# Altium PCB Prog_Adaptor_V1.PcbDoc
Units mm, origin at the board's own origin, x right, y up, seen from the top; angles counter-clockwise.
Board outline 46.85 x 29.75 mm, 2 copper layers (Top Layer, Bottom Layer), stack 1.591 mm thick; 8 components, 10 nets, 57 pads, 0 vias.
Unrouted connection lines stored in the file: 29.
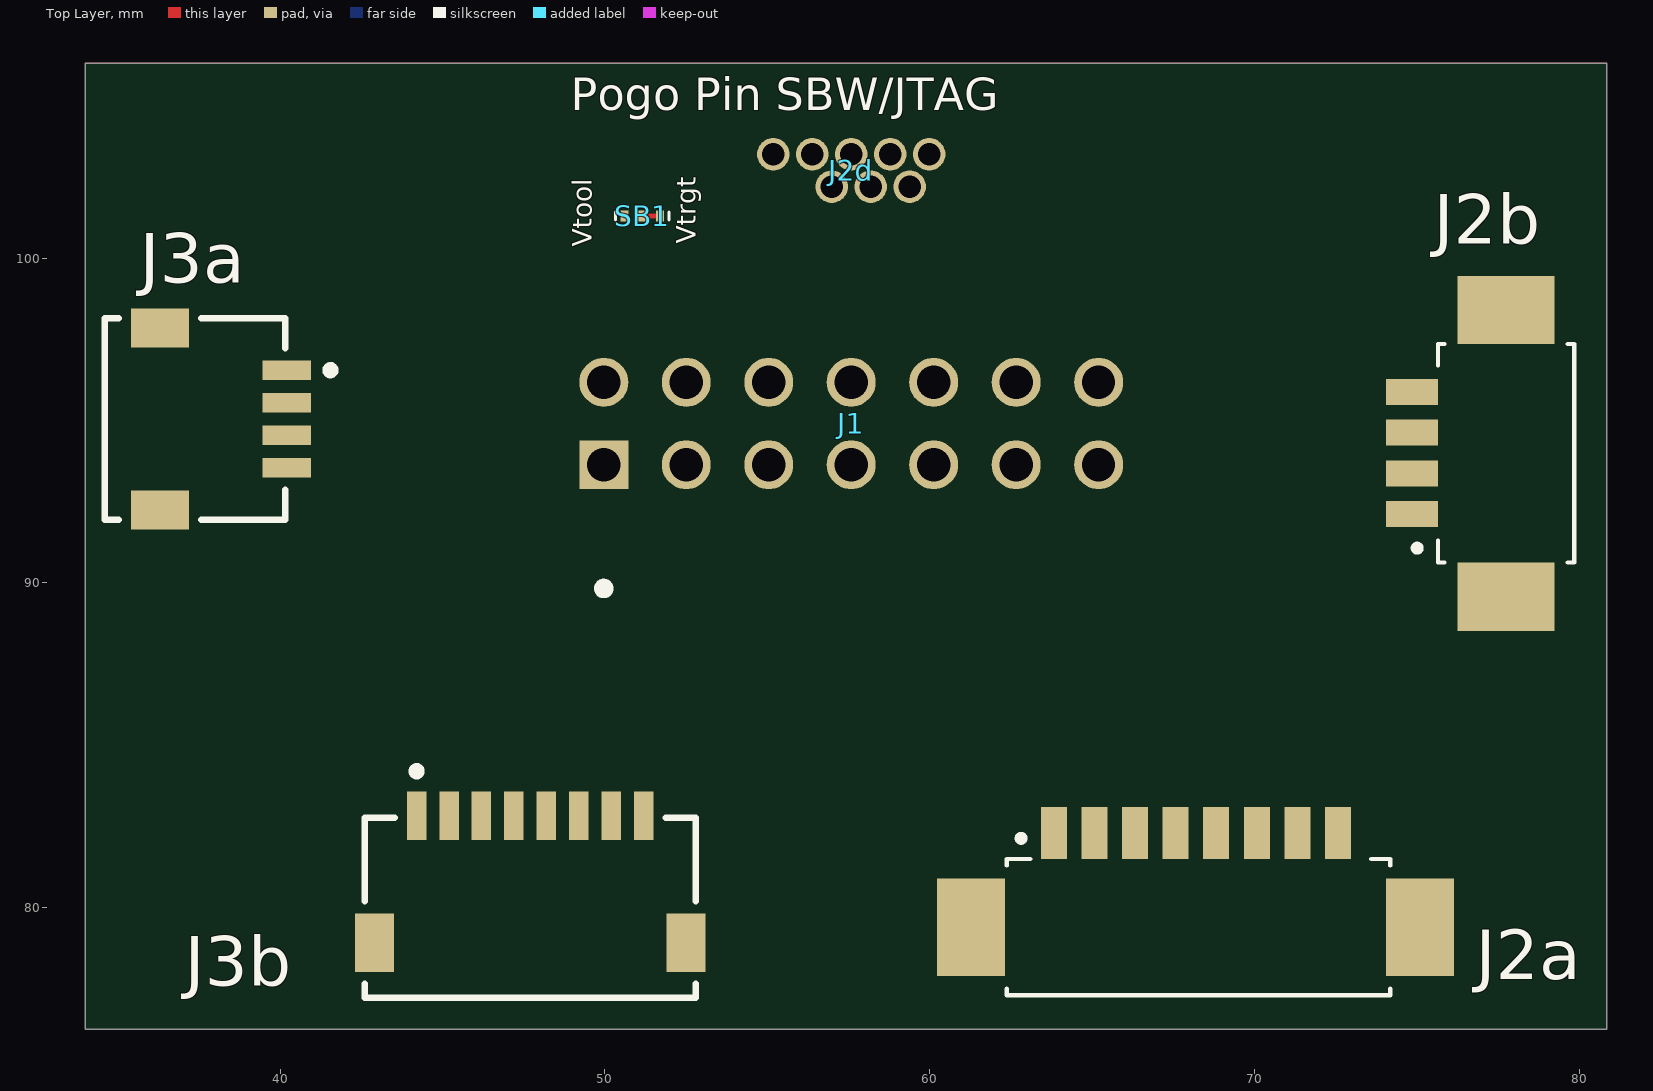
[diagram p0: Top Layer view]
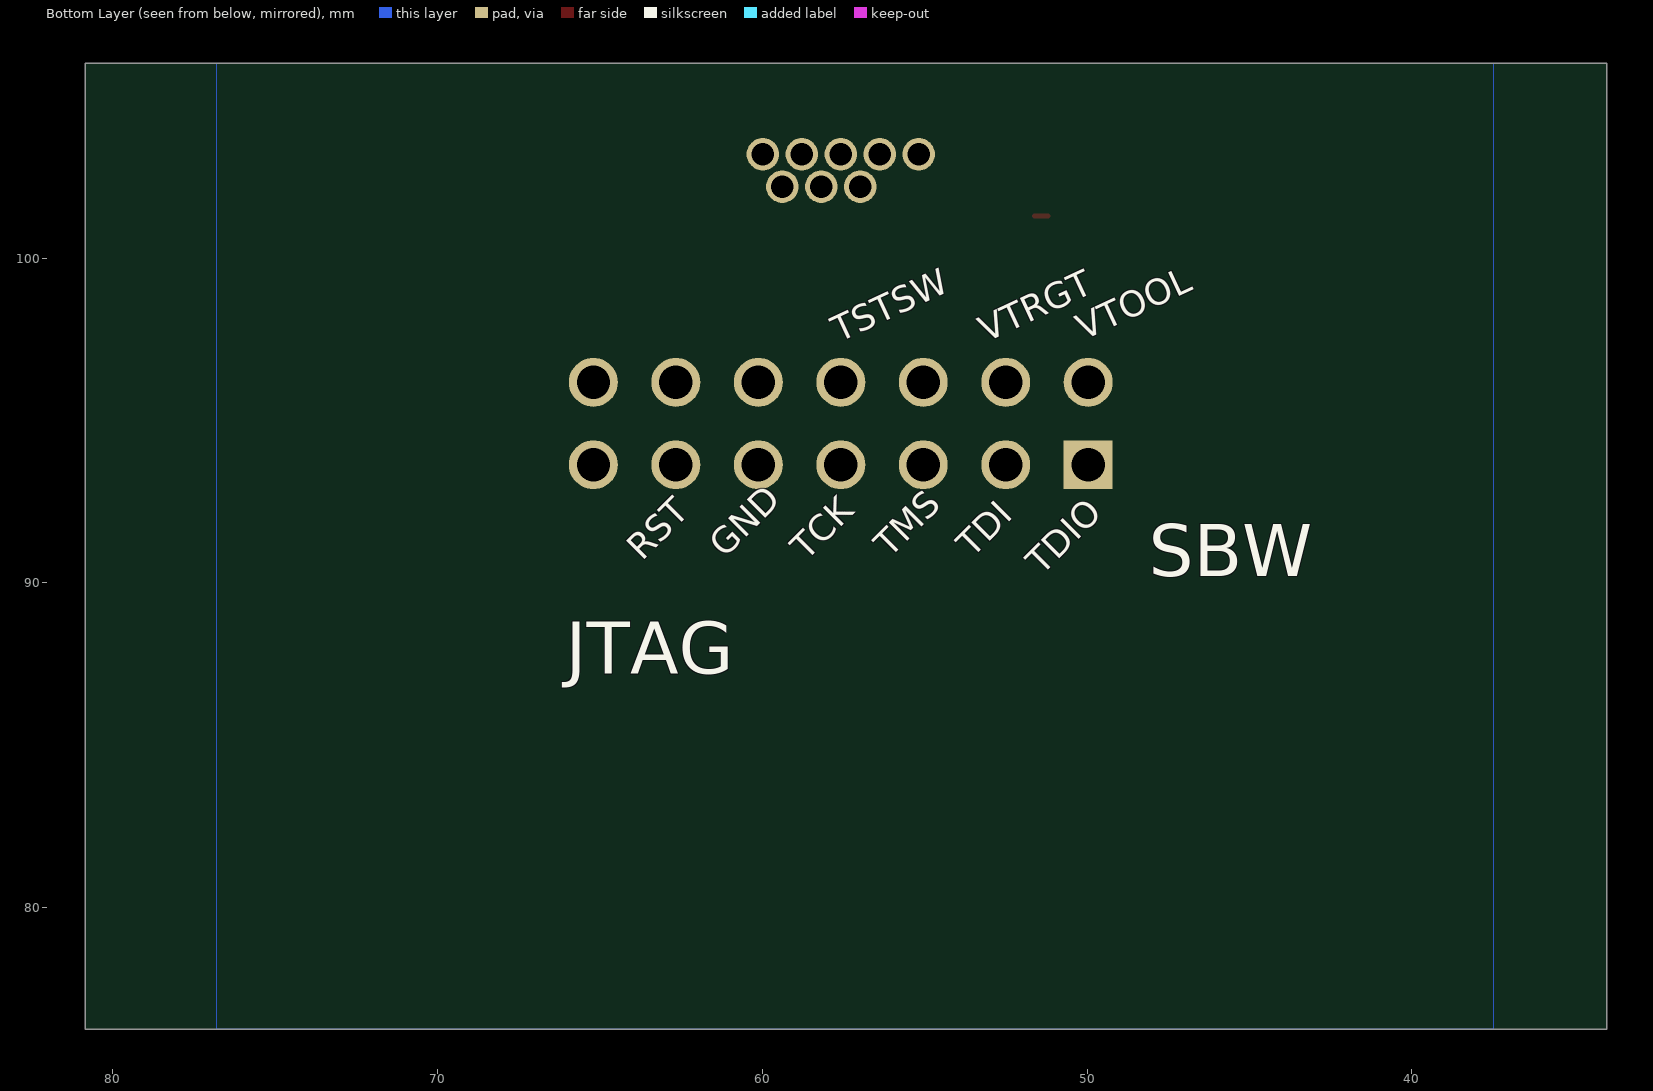
[diagram p1: Bottom Layer view, seen from below]

## Layer stack, top to bottom
Top Solder: solder mask 0.0102, Solder Resist, Dk 3.5
Top Layer: signal copper 0.0356
Dielectric 1: dielectric 1.52, FR-4, Dk 4.8
Bottom Layer: signal copper 0.0356
Bottom Solder: solder mask 0.0102, Solder Resist, Dk 3.5

## Board outline
34,76.25 34,106 80.85,106 80.85,76.25

## Design rules (kind name [scope] priority, off if disabled: settings)
BoardOutlineClearance [All] p1: gap=0.254 ignorepadtopadclearanceinfootprint=FALSE except(0: Arc-SplitContinuation Track-SplitContinuation SMDPad-SplitContinuation THPad-SplitContinuation Via-SplitContinuation Fill-SplitContinuation Poly-SplitContinuation Region-SplitContinuation Text-SplitContinuation)
Clearance [All] p1: gap=0.152 ignorepadtopadclearanceinfootprint=FALSE except(0: Arc-Hole Track-Hole SMDPad-Hole THPad-Hole Via-Hole Fill-Hole Poly-Hole Region-Hole Text-Hole; 0.127: THPad-THPad Via-Via)
HoleSize [All] p1: absolutevalues=TRUE maxlimit=6.2 minlimit=0.3 maxpercent=80.000 minpercent=20.000
MinimumAnnularRing [All] p1: minimumring=0.15
MinimumSolderMaskSliver [All] p1: minsoldermaskwidth=0.1
PolygonConnect ViaConnect [IsVia] p1: connectstyle=Direct reliefconductorwidth=0.254 reliefentries=4 polygonreliefangle="90 Angle" airgapwidth=0.254
PolygonConnect [All] p2: connectstyle=Relief reliefconductorwidth=0.254 reliefentries=4 polygonreliefangle="90 Angle" airgapwidth=0.254
RoomDefinition Prog_Adaptor [InComponentClass('Prog_Adaptor')] p1: confinementstyle=ConfineIn formatcopy=TRUE lockcomponents=FALSE outline 34,76.25 80.9,76.25 80.9,106 34,106
RoutingVias [All] p1: holewidth=0.3 width=0.6 viastyle="Through Hole" minholewidth=0.3 minwidth=0.5 maxholewidth=1 maxwidth=5
SilkToSilkClearance [All] p1: silktosilkclearance=0.1
SilkToSolderMaskClearance [IsPad] p1: minsilkscreentomaskgap=0.1 clearancetoexposedcopper=TRUE
SolderMaskExpansion [All] p1: expansion=0.051 istentingtop=FALSE
SupplyNets "Schematic Supply Nets_1" [InNet('GND')] p1: voltage=0.000
SupplyNets "Schematic Supply Nets" [InNet('3v3')] p2: voltage=0.000
Width [All] p1: maxlimit=25.4 minlimit=0.15 preferedwidth=0.3
26 further rules are at their usual default settings.

## Components (designator, comment, footprint, x,y, rotation, side; value= is the part's Value field where it differs from the comment)
J1 "SBH11-PBPC-D07-ST-BK" SBH11-PBPC-D07-ST-BK 57.586,94.908 r0 top
J2a "0532610871" MOLEX_0532610871 68.2,79.4 r0 top
J2b "0532610471" MOLEX_0532610471 77.75,94 r90 top
J2c "Header 4" HDR1X4 79.97,164.8 r0 bottom
J2d "*" POGO_8_PIN_HEADER 57.586,102.7 r0 top
J3a "501568-0407" FP-501568-0407-MFG 37.375,95.05 r270 top
J3b "501568-0807" FP-501568-0807-MFG 47.7,80 r0 top
SB1 "Solder Jumper 3-pin Left connected 0201" "Solder Bridge 3-pin Left shorted 0201" 51.15,101.3 r180 top net-tie

## Footprints (in the part's own frame and the unit in brackets; to place one, negate y for a bottom-side part, rotate by r counter-clockwise, add the part's x,y. Pads: shape width x height; smd on the part's side, far side on the other; paste and mask are expansions set on the pad)
FP-501568-0407-MFG [mm]
  rect 0.6x1.5 smd paste+0 mask+0: 1(-1.5,2.825) 2(-0.5,2.825) 3(0.5,2.825) 4(1.5,2.825)
  rect 1.2x1.8 smd paste+0 mask+0: 5(-2.8,-1.075) 6(2.8,-1.075)
  silkscreen extent -3.1,-2.78 3.1,4.3, body extent -3.5,-2.88 3.5,3.67, height 0.25
FP-501568-0807-MFG [mm]
  rect 0.6x1.5 smd paste+0 mask+0: 1(-3.5,2.825) 2(-2.5,2.825) 3(-1.5,2.825) 4(-0.5,2.825) 5(0.5,2.825) 6(1.5,2.825) 7(2.5,2.825) 8(3.5,2.825)
  rect 1.2x1.8 smd paste+0 mask+0: 9(-4.8,-1.075) 10(4.8,-1.075)
  silkscreen extent -5.1,-2.78 5.1,4.32, body extent -5.5,-2.88 5.5,3.67, height 0.25
HDR1X4 [mm] "Connector; Header; 4 Position"
MOLEX_0532610471 [mm] "Header - Picoblade 04-pin, SMT, RA, 3.4mm height"
  rect 0.8x1.6 smd mask+0.051: 1(-1.875,2.9) 2(-0.625,2.9) 3(0.625,2.9) 4(1.875,2.9)
  rect 2.1x3 smd mask+0.051: MP1(-4.425,0) MP2(4.405,0)
  silkscreen extent -3.38,-2.1 3.35,2.83, body extent -5.07,-2.1 5.07,3.1, height 3.4
MOLEX_0532610871 [mm] "Header - Picoblade 08-pin, SMT, RA, 3.4mm height"
  rect 0.8x1.6 smd mask+0.051: 1(-4.375,2.9) 2(-3.125,2.9) 3(-1.875,2.9) 4(-0.625,2.9) 5(0.625,2.9) 6(1.875,2.9) 7(3.125,2.9) 8(4.375,2.9)
  rect 2.1x3 smd mask+0.051: MP1(-6.925,0) MP2(6.905,0)
  silkscreen extent -5.83,-2.1 5.98,2.83, body extent -7.57,-2.1 7.58,3.1, height 3.42
POGO_8_PIN_HEADER [mm]
  round 1 hole 0.7 mask+0.033: 1(-2.4,0.5) 2(-1.2,0.5) 3(-0.6,-0.5) 4(0,0.5) 5(0.6,-0.5) 6(1.2,0.5) 7(1.8,-0.5) 8(2.4,0.5)
SBH11-PBPC-D07-ST-BK [mm]
  rect 1.508x1.508 hole 1.02: 01(-7.62,-1.27)
  round 1.508 hole 1.02: 02(-7.62,1.27) 03(-5.08,-1.27) 04(-5.08,1.27) 05(-2.54,-1.27) 06(-2.54,1.27) 07(0,-1.27) 08(0,1.27) 09(2.54,-1.27) 10(2.54,1.27) 11(5.08,-1.27) 12(5.08,1.27) 13(7.62,-1.27) 14(7.62,1.27)
  silkscreen extent -7.72,-5.18 -7.52,-4.98, body extent -12.7,-4.44 12.7,4.83, height 8.89
"Solder Bridge 3-pin Left shorted 0201" [mm]
  rect 0.25x0.35 smd paste-100 mask+0: 1(0,0) 2(-0.55,0) 3(0.55,0)
  Top Layer lines w0.15: -0.05,0 -0.475,0
  silkscreen extent -0.82,-0.13 0.83,0.13

## Part data
J1: "14-pin JTAG Male Header"
J2a: "Header - Picoblade 08-pin, SMT, RA", Supplier 1 Part No.=WM7626CT-ND, MF Part No.=0532610871, Mounting Type="Surface Mount", Orientation="Right Angle", Pins=8, Pitch=1.25mm, Supplier 1=Digikey
J2b: "Header - Picoblade 04-pin, SMT, RA", Supplier 1 Part No.=WM7622CT-ND, MF Part No.=0532610471, Mounting Type="Surface Mount", Orientation="Right Angle", Pins=4, Pitch=1.25mm, Supplier 1=Digikey
J2c: "Header, 4-Pin", LatestRevisionDate=17-Jul-2002, LatestRevisionNote="Re-released for DXP Platform.", Publisher="Altium Limited"
J2d: library part "Headerless Pogo Holes 8-pin"
J3a: library part CMP-002-00077-1, "Board Connector, 4 Contact(s), 1 Row(s), Male, Right Angle, 0.039 inch Pitch, Crimp Terminal, Locking, Natural Insulator", Max Operating Temperature=85°C, Min Operating Temperature=-40°C, Connector Type="BOARD CONNECTOR", Mounting Technology=Cable, RoHS Compliant=Yes
J3b: library part CMP-002-00073-1, "Board Connector, 8 Contact(s), 1 Row(s), Male, Right Angle, 0.039 inch Pitch, Surface Mount Terminal, Locking, Natural Insulator", Max Operating Temperature=85°C, Min Operating Temperature=-40°C, Connector Type="BOARD CONNECTOR", Mounting Technology=Board, RoHS Compliant=Yes
SB1: library part "Solder Jumper 3-pin Normally Closed 0201", DEBUG=DEBUG

## Nets (pads, with @x,y where several pads share a name; then routed paths per layer and width w, separated by ;. In a path a pad name is that pad's centre, name@x,y a point inside that pad or via, vN(x,y) a via of type N, cw(c..) or ccw(c..) an arc to the next point about the centre after c; other vN are vias at no path point)
3v3: J2a.6 J2b.3 J2d.2 J3a.3 J3b.6 SB1.1
GND: J1.09 J2a.2 J2a.MP1 J2a.MP2 J2b.4 J2b.MP1 J2b.MP2 J2d.3 J3a.4 J3a.5 J3a.6 J3b.2 J3b.9 J3b.10
JTAG_TCK/SBW_TCK: J1.07 J2a.4 J2b.2 J2d.4 J3a.2 J3b.4
JTAG_TDI: J1.03 J2a.7 J2d.5 J3b.7
JTAG_TDO/SBW_TDIO: J1.01 J2a.8 J2b.1 J2d.1 J3a.1 J3b.8
JTAG_TEST/SBW_TCK: J1.08 J2a.3 J2d.7 J3b.3
JTAG_TMS: J1.05 J2a.5 J2d.6 J3b.5
Reset: J1.11 J2a.1 J2d.8 J3b.1
VccTarget: J1.04 SB1.2
VccTool: J1.02 SB1.3
pads on no net: J1.06 J1.10 J1.12 J1.13 J1.14
copper on no net: | length 0.7
  Bottom Layer w0.254: 57.636,95.664 57.636,96.378

## Polygon pours and split planes (outlines as drawn)
GND on Bottom Layer "GND" (solid, remove dead copper, shelved, pour order 4): 37.5,106 37.5,76.25 76.8,76.25 76.8,106
GND on Top Layer "GND" (solid, remove dead copper, shelved, pour order 0): 34,106 34,76.25 80.85,76.25 80.85,106

## Silkscreen, mask and mechanical layers (free items; w line width, h text height)
Top Overlay:
  text "Pogo Pin SBW/JTAG" at 48.95,104.55 h1
  text "Vtrgt" at 52.8,100.45 h0.6 r90
  text "Vtool" at 49.6,100.35 h0.6 r90
  text "JTAG Adapter V4" at 53.8,65.7 h2
Bottom Overlay:
  text "VTOOL" at 50.1,97.45 h0.8 r335
  text "VTRGT" at 53.106,97.395 h0.8 r335
  text "TSTSW" at 57.636,97.395 h0.8 r335
  text "TDI" at 53.54,90.75 h0.8 r315
  text "TMS" at 56.08,90.75 h0.8 r315
  text "GND" at 61.16,90.75 h0.8 r315
  text "TCK" at 58.65,90.65 h0.8 r315
  text "RST" at 63.7,90.65 h0.8 r315
  text "SBW" at 48.1,90.2 h1.6
  text "TDIO" at 51.4,90.2 h0.8 r315
  text "JTAG" at 66.05,87.2 h1.6